# Altium PCB AIRZAI_LED_SENSE_FLEX_REVA.PcbDoc (part 2 of 2)
Units mm, origin at the board's own origin, x right, y up, seen from the top; angles counter-clockwise.
Board outline 70.94 x 92.79 mm, 2 copper layers (Top Layer, Bottom Layer); 62 components, 41 nets, 168 pads, 73 vias.
Unrouted connection lines stored in the file: 86.
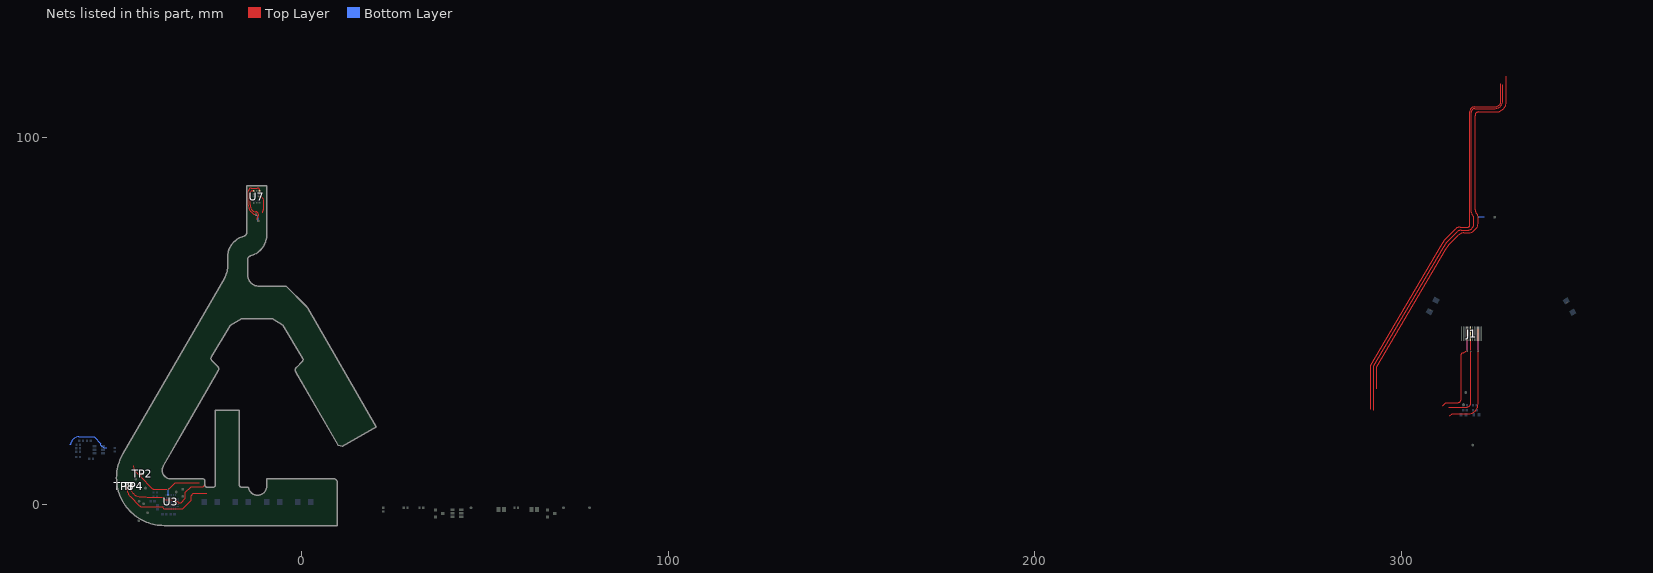
[diagram p2: the nets of this part, all layers, seen from the top]

## Via types
v1: diameter 0.406, hole 0.203, Top Layer to Bottom Layer, tented both sides, 51 vias
v2: diameter 0.508, hole 0.254, Top Layer to Bottom Layer, tented both sides, 17 vias
v3: diameter 0.508, hole 0.203, Top Layer to Bottom Layer, 5 vias

## Nets (pads, with @x,y where several pads share a name; then routed paths per layer and width w, separated by ;. In a path a pad name is that pad's centre, name@x,y a point inside that pad or via, vN(x,y) a via of type N, cw(c..) or ccw(c..) an arc to the next point about the centre after c; other vN are vias at no path point) (continued)
SDA: J1.9 TP2.1 U3.8 U7.9 | length 177.4
  Top Layer w0.152: -40.302,4.089 -36.369,4.089 -34.63,5.828 -27.97,5.828 ; 311.355,26.88 312.193,27.718 315.491,27.718 ccw(c315.491,28.586) 316.104,27.972 ccw(c315.535,28.542) 316.34,28.542 316.34,40.967 316.67,41.297 317.128,41.297 317.576,41.746 v1(317.977,41.746) J1.9@317.977,46.546 J1.9@317.977,47.752
  Top Layer w0.203: -45.978,10.462 ccw(c-43.438,10.462) -45.234,8.666 -44.175,7.607 ; TP2.1@-43.514,8.287 -44.175,7.607 ; -40.302,4.089 cw(c-40.302,4.948) -40.909,4.341 -44.175,7.607 ; U7.9@-11.538,83.895 -11.348,83.895 cw(c-11.348,83.157) -10.826,83.679 cw(c-11.991,82.514) -10.344,82.514 -10.344,80.802 cw(c-11.124,80.802) -10.572,80.25 ccw(c-9.898,79.575) -10.852,79.575 ; 293.345,37.498 312.212,69.537 313.158,70.949 315.646,73.437 cw(c317.12,71.963) 317.12,74.048 318.392,74.048 ccw(c318.392,76.129) 319.864,74.658 320.471,75.265 ccw(c319.238,76.497) 320.981,76.497 320.981,78.456 ccw(c319.867,78.456) 320.655,79.243 cw(c321.83,80.418) 320.168,80.418 320.168,106.068 cw(c321.223,106.068) 320.477,106.814 cw(c321.027,106.265) 321.027,107.042 325.973,107.042 ccw(c325.973,109.582) 327.769,107.786 327.959,107.975 ccw(c326.163,109.771) 328.703,109.771 328.703,116.757 ; 293.346,31.514 293.346,37.497
  Bottom Layer w0.152: -63.396,16.314 ccw(c-63.396,16.803) -63.051,16.457 ccw(c-63.441,16.847) -62.889,16.847 cw(c-61.785,16.847) -62.566,17.628 -62.457,17.736 cw(c-60.912,16.191) -60.912,18.376 -56.684,18.376 -54.841,16.534 -54.841,16.117 -54.117,15.392 -53.222,15.392 ; U3.8@-36.535,2.555 -36.535,3.923 v1@-36.517,3.941 ; v1(320.977,78.493) 322.709,78.493
  Bottom Layer w0.203: v1(317.977,41.746) J1.9@317.977,46.546 J1.9@317.977,46.575
  other v1: -36.517,4.043
TOFINT: J1.7 TP4.1 U7.7 | length 177.6
  Top Layer w0.152: -42.819,2.072 -42.421,2.072 -42.203,1.854 -37.988,1.854 -37.307,1.172 -35.555,1.172 -35.17,0.787 -34.082,0.787 -33.726,0.432 -32.939,0.432 -31.796,1.575 -31.796,3.2 -30.224,4.772 -26.944,4.772 -26.319,5.397 ; 313.006,26.448 317.591,26.448 ccw(c317.591,28.009) 318.695,26.906 ccw(c318.014,27.587) 318.977,27.587 v1(318.977,41.805) J1.7@318.977,46.546 J1.7@318.977,47.723
  Top Layer w0.203: -46.829,4.647 ccw(c-44.292,4.786) -46.088,2.99 -45.915,2.816 ccw(c-44.119,4.612) -44.119,2.072 -42.819,2.072 ; -46.816,4.863 TP4.1@-46.054,4.882 ; -13.58,79.487 -13.867,79.775 cw(c-12.071,81.571) -14.611,81.571 -14.611,85.417 cw(c-13.657,85.417) -14.332,86.092 cw(c-13.841,85.601) -13.841,86.295 -12.173,86.295 cw(c-12.173,85.612) -11.69,86.095 cw(c-12.058,85.727) -11.538,85.727 U7.7@-11.538,85.495 ; -13.579,79.487 ccw(c-12.477,80.589) v2(-12.477,79.031) ; 292.494,37.752 311.469,69.974 312.447,71.508 315.262,74.323 cw(c316.438,73.147) 316.438,74.81 318.273,74.81 ccw(c318.273,76.198) 319.254,75.216 319.425,75.388 ccw(c318.475,76.338) 319.819,76.338 319.819,78.176 ccw(c319.191,78.176) 319.635,78.62 cw(c320.739,79.724) 319.178,79.724 319.178,107.029 cw(c320.132,107.029) 319.457,107.703 cw(c320.07,107.09) 320.07,107.957 325.416,107.957 ccw(c325.416,110.497) 327.212,108.701 ccw(c326.064,109.848) 327.687,109.848 327.687,114.434 ; 292.496,25.699 292.496,37.751
  Bottom Layer w0.203: v2(-12.477,79.031) cw(c-13.949,77.559) -11.868,77.559 v2(-11.868,77.253) ; v1(318.977,41.805) J1.7@318.977,46.546
XSHUNT: J1.3 TP8.1 U7.5 | length 179.2
  Top Layer w0.152: -44.393,-0.357 ccw(c-43.421,0.616) -43.421,-0.759 -38.174,-0.759 -37.718,-1.215 -32.504,-1.215 -30.256,1.033 -30.256,2.366 -29.587,3.034 -26.006,3.034 ; 313.318,24.086 313.898,24.666 318.384,24.666 ccw(c318.384,27.206) 320.18,25.41 320.233,25.464 ccw(c318.437,27.26) 320.977,27.26 v1(320.977,41.805) J1.3@320.977,46.546 J1.3@320.977,47.723
  Top Layer w0.203: TP8.1@-48.442,4.863 -47.645,4.863 -47.645,3.948 ccw(c-45.105,3.948) -46.901,2.151 -44.393,-0.357 ; U7.5@-13.138,85.495 -13.552,85.495 ccw(c-13.552,84.931) -13.951,85.33 ccw(c-13.495,84.875) -14.139,84.875 -14.139,81.732 ccw(c-11.934,81.732) -13.493,80.174 ccw(c-12.574,81.093) -12.574,79.793 cw(c-12.574,79.113) -12.093,79.594 cw(c-12.699,78.988) -11.842,78.988 -11.842,78.879 cw(c-12.598,78.879) -12.064,78.345 -12.094,78.315 ccw(c-11.412,77.634) -12.376,77.634 ; 291.678,37.955 310.774,70.383 311.837,72.118 314.849,75.129 cw(c316.102,73.876) 316.102,75.648 318.298,75.648 ccw(c318.298,75.995) 318.543,75.75 ccw(c318.114,76.179) 318.721,76.179 318.721,107.042 cw(c320.195,107.042) 319.152,108.084 cw(c319.95,107.287) 319.95,108.414 325.341,108.414 ccw(c325.341,110.582) 326.874,109.049 ccw(c326.138,109.785) 327.179,109.785 327.179,114.815 ; 291.679,25.915 291.679,37.955
  Bottom Layer w0.203: v1(320.977,41.805) J1.3@320.977,46.546
pads on no net: U7.8
copper on no net: | length 287.3
  Top Layer w0.152: -42.692,1.503 -38.168,1.503 -37.533,0.868 -36.778,0.868 -35.987,0.076 -35.58,0.076 -35.195,0.461 -34.256,0.461 -33.863,0.068 -32.821,0.068 -31.491,1.398 -31.491,2.946 -30.082,4.355 -26.81,4.355 -26.211,4.954 ; 313.113,26.006 317.913,26.006 ccw(c317.913,27.647) 319.073,26.487 ccw(c318.098,27.462) 319.477,27.462 v1(319.477,42.262) 319.477,46.546 319.477,48.181
  Top Layer w0.203: -47.239,4.329 ccw(c-44.699,4.329) -46.495,2.532 -46.209,2.246 ccw(c-44.413,4.043) -44.413,1.503 ; -44.429,0.787 -44.413,1.503 ; -42.692,1.503 -44.413,1.503 ; -42.466,3.454 -42.345,3.454 cw(c-42.345,2.688) -41.803,3.23 -41.387,2.814 ccw(c-41.165,3.035) -41.165,2.722 -35.86,2.722 -35.464,2.326 -34.452,2.326 -34.056,1.93 -33.878,1.93 -33.353,1.405 v1(-32.987,1.405) ; -42.032,2.616 -41.68,2.265 -36.088,2.265 -35.011,1.187 -33.887,1.187 -33.876,1.198 -33.583,0.905 v1(-33.291,0.905) ; 292.084,37.828 311.132,70.173 312.117,71.799 314.912,74.594 cw(c316.353,73.153) 316.353,75.191 318.239,75.191 ccw(c318.239,76.232) 318.975,75.496 ccw(c318.3,76.17) 319.254,76.17 v1(319.254,78.061) ; 292.085,25.38 292.085,37.828
  Top Layer w0.305: v2(-45.004,5.308) -45.004,5.112 ccw(c-42.464,5.112) -44.26,3.316 -44.119,3.175 ccw(c-43.204,4.09) -43.204,2.796 -42.466,2.796 cw(c-42.466,2.182) -42.032,2.616 ; v2(-43.586,5.139) -43.586,4.006 ccw(c-43.136,4.006) -43.454,3.687 -43.393,3.626 ccw(c-42.979,4.041) -42.979,3.454 -42.466,3.454
  Bottom Layer w0.152: -63.318,17.03 ccw(c-63.617,17.33) -63.194,17.33 cw(c-62.477,17.33) -62.984,17.837 -62.83,17.99 cw(c-61.052,16.212) -61.052,18.727 -56.493,18.727 -54.507,16.741 -54.507,16.314 ccw(c-53.489,17.332) -53.489,15.892 -53.222,15.892 ; v1(319.254,78.061) 319.254,78.307 cw(c319.948,78.307) 319.457,78.798 cw(c319.886,78.369) 319.886,78.976 322.223,78.976 ccw(c322.223,79.774) 322.788,79.21
  Bottom Layer w0.203: -33.885,0.905 v1(-33.291,0.905) ; -33.885,1.405 v1(-32.987,1.405) ; v1(319.477,42.262) 319.477,46.546
  Bottom Layer w0.305: -59.587,17.268 -59.528,17.327 -58.639,17.327 -58.639,16.91 -57.622,15.892 ; v2(-45.004,5.308) -45.004,8.287 ; v2(-43.586,5.139) -41.558,5.139 ; 294.321,29.339 307.723,52.556 ; 297.766,26.191 301.271,32.062 316.079,57.589 315.85,58.884 314.479,60.307 314.326,60.713 314.352,61.17 314.479,61.577 319.787,70.39 323.031,72.322 331.7,72.245 334.799,70.365 343.401,56.408 345.027,55.469

## Polygon pours and split planes (outlines as drawn)
3V3 on Top Layer "3.3V Top 1" (solid, remove dead copper, pour order 16): 316.054,76.087 318.289,76.087 318.289,107.382 cw(c319.676,107.382) 318.695,108.363 cw(c319.799,107.26) 319.799,108.821 325.292,108.821 ccw(c325.292,110.555) 326.518,109.329 ccw(c325.967,109.881) 326.747,109.881 326.747,114.663 324.817,114.663 324.817,112.337 cw(c323.256,112.337) 324.359,111.234 cw(c323.01,112.583) 323.01,110.675 317.293,110.675 ccw(c317.293,109.461) 316.435,110.319 ccw(c317.354,109.399) 316.054,109.399
3V3 on Bottom Layer "3v3 bot 1" (solid, remove dead copper, pour order 14): 290.933,14.612 289.307,14.612 288.037,15.298 287.021,16.161 286.107,17.33 285.624,18.168 285.066,19.769 284.913,21.284 285.091,23.261 285.548,25.37 286.336,28.411 287.529,31.147 290.146,35.618 295.835,45.295 302.998,57.462 309.704,68.739 311.736,72.346 315.012,75.802 315.919,76.709 cw(c317.715,74.913) 317.715,77.453 323.42,77.453 323.42,76.211 318.135,76.211 ccw(c318.176,73.322) 316.104,75.336 313.107,72.339 311.329,69.679 289.028,31.782 287.682,28.993 286.971,26.321 286.285,23.451 286.132,21.8 286.209,20.225 286.717,18.778 287.529,17.609 288.469,16.669 289.511,15.958 290.019,15.73 290.806,15.653 290.933,15.653

## Keep-outs
Keep-Out Layer:
  lines w0.05: 315.952,48.546 cw(c315.977,48.546) 315.977,48.572 322.477,48.572 cw(c322.477,48.546) 322.503,48.546
  lines w0.127: 284.551,21.17 284.564,21.551 284.761,23.426 285.269,25.788 286.005,28.455 287.182,31.264 305.837,63.043 311.444,72.594 314.067,75.416 314.575,75.924 314.716,76.072 314.975,76.388 315.203,76.728 315.395,77.088 315.552,77.466 315.67,77.857 315.75,78.258 315.79,78.664 315.795,78.869 315.795,79.528 315.795,109.729 315.795,109.852 315.843,110.094 315.938,110.323 316.075,110.528 316.162,110.615 316.259,110.712 316.486,110.863 316.738,110.968 317.006,111.021 322.839,111.021 323.026,111.031 323.393,111.104 323.739,111.247 324.05,111.454 324.188,111.58 324.26,111.659 324.379,111.837 324.46,112.034 324.502,112.243 324.507,112.35 324.507,124.204 330.007,124.204 330.007,108.009 330.007,107.902 329.965,107.692 329.883,107.494 329.764,107.316 329.688,107.24 329.555,107.107 329.243,106.898 328.896,106.754 328.527,106.681 322.643,106.681 322.507,106.674 322.24,106.621 321.989,106.517 321.763,106.366 321.662,106.275 321.579,106.183 321.443,105.979 321.349,105.752 321.301,105.511 321.295,105.389 321.295,80.627 321.307,80.542 321.376,80.385 321.495,80.261 321.649,80.187 321.733,80.171 322.156,80.171 322.238,80.185 322.387,80.259 322.496,80.385 322.548,80.543 322.551,80.627 322.551,105.277 332.051,105.277 332.051,86.434 332.058,86.134 332.117,85.535 332.235,84.944 332.409,84.369 332.639,83.813 332.923,83.282 333.257,82.782 333.639,82.316 333.847,82.098 340.644,75.301 343.242,72.457 348.766,62.858 359.97,43.386 359.97,42.297 350.72,36.972 350.675,36.946 349.453,37.275 337.935,57.293 337.885,57.361 337.814,57.516 337.775,57.681 337.768,57.851 337.795,58.019 337.854,58.178 337.943,58.322 338.059,58.447 338.127,58.497 339.66,60.075 339.813,60.304 339.889,60.634 339.813,60.964 334.376,70.034 331.517,71.763 323.517,71.798 323.337,71.799 323.158,71.797 320.031,69.95 314.836,61.28 314.76,60.95 314.836,60.619 314.988,60.391 316.521,58.813 316.59,58.763 316.705,58.638 316.794,58.494 316.854,58.334 316.88,58.167 316.874,57.997 316.835,57.832 316.764,57.677 316.714,57.609 306.949,40.639 301.807,31.703 301.709,31.53 301.558,31.164 301.47,30.778 301.448,30.382 301.493,29.989 301.602,29.608 301.774,29.251 302.003,28.928 302.283,28.648 302.606,28.418 302.963,28.246 303.344,28.136 303.539,28.105 305.119,28.099 315.383,28.099 315.501,28.114 315.718,28.209 315.882,28.379 315.968,28.6 315.977,28.718 315.977,48.546 322.477,48.546 322.477,28.709 322.488,28.591 322.578,28.372 322.744,28.203 322.962,28.112 323.081,28.099 325.291,28.099 325.391,28.1 325.574,28.024 325.715,27.884 325.791,27.7 325.791,27.601 325.791,25.146 325.803,25.037 325.889,24.837 326.045,24.685 326.247,24.604 326.356,24.594 328.06,24.594 328.169,24.604 328.371,24.685 328.527,24.837 328.613,25.037 328.625,25.146 328.625,27.601 328.624,27.701 328.7,27.886 328.841,28.028 329.025,28.105 329.125,28.105 348.185,28.105 348.335,28.105 348.532,28.066 348.717,27.99 348.883,27.879 349.025,27.737 349.136,27.571 349.212,27.386 349.251,27.19 349.251,27.089 349.251,15.382 349.251,15.28 349.211,15.079 349.133,14.889 349.019,14.719 348.874,14.574 348.703,14.46 348.514,14.381 348.313,14.341 342.527,14.341 289.227,14.342 288.874,14.486 288.201,14.845 287.568,15.269 286.981,15.756 286.447,16.299 285.97,16.894 285.556,17.534 285.209,18.213 284.932,18.924 284.729,19.658 284.602,20.41 284.551,21.17 ; 307.092,53.76 309.086,52.613 310.129,54.426 308.136,55.573 307.092,53.76 ; 313.666,20.639 315.766,20.639 315.766,22.939 313.666,22.939 313.666,20.639 ; 322.166,20.639 324.266,20.639 324.266,22.939 322.166,22.939 322.166,20.639 ; 330.666,20.639 332.766,20.639 332.766,22.939 330.666,22.939 330.666,20.639 ; 339.166,20.639 341.266,20.639 341.266,22.939 339.166,22.939 339.166,20.639 ; 344.396,54.265 345.44,52.452 347.433,53.599 346.389,55.412 344.396,54.265

## Other copper
Top Layer:
  pour cut-out: 326.442,96.933 326.442,87.154 326.493,86.773 326.62,86.316 326.823,85.834 326.976,85.58 327.128,85.351 327.491,84.945 333.783,78.62 333.783,77.452 331.395,77.426 331.395,75.67 334.037,75.648 334.037,75.47 336.043,75.47 336.043,78.493 335.942,78.518 335.916,78.569 335.916,78.722 335.866,78.874 335.739,79.128 335.281,79.611 328.576,86.316 328.347,86.646 328.22,87.002 328.169,87.231 328.169,96.933
  pour cut-out: 329.922,73.515 336.501,72.041 336.526,72.016 343.562,60.256 345.111,60.942 344.73,61.678 337.771,73.312 337.669,73.438 337.489,73.565 337.288,73.642 329.922,75.293
  pour cut-out: 323.496,75.597 323.496,77.02 324.969,77.02 324.994,77.045 324.994,77.858 329.964,77.858 329.998,77.824 329.998,75.452 330.176,75.452 330.176,73.464 329.668,73.565 327.001,73.565 327.001,74.073 324.523,74.073 317.781,70.975 311.761,60.332 310.186,61.196 316.435,72.194 316.562,72.346 316.714,72.448
  pour cut-out: 322.551,96.806 332.051,96.806 332.051,105.277 322.551,105.277
  pour cut-out: 315.952,48.546 315.952,44.04 322.503,44.04 322.503,48.546
Bottom Layer:
  rectangle net 3V3: -63.499,14.129 -61.263,14.587
  rectangle net 3V3: -14.198,80.627 -12.833,84.923
  rectangle net 3V3: -14.738,76.128 -12.96,84.923
  rectangle net 3V3: 290.654,14.612 319.965,15.653
  rectangle net +5V: 310.313,16.339 318.619,17.75
  rectangle net 3V3: 319.025,14.993 319.965,27.82
  rectangle net NetJ1_11: 320.245,26.525 321.057,29.242
  rectangle net NetJ1_11: 317.171,28.286 321.057,29.242
  rectangle net NetJ1_11: 317.171,28.286 317.96,40.088
  rectangle net NetJ1_12: 316.344,26.55 317.273,27.82
  rectangle net NetJ1_12: 316.231,26.55 316.981,40.088
  rectangle net +5V: 317.606,16.441 318.619,27.82
  pour cut-out: -37.985,2.845 cw(c-38.017,2.813) -37.972,2.813 -37.972,-1.561 -33.636,-1.561 -33.636,2.855 -37.968,2.855
  pour cut-out: 343.308,60.942 344.603,61.653 344.883,61.5 345.06,61.323 345.187,61.069 345.213,60.84 345.518,60.281 345.899,60.484 351.639,50.578 345.949,47.302 340.133,57.386 343.968,59.468 343.765,59.951 343.511,60.154 343.384,60.307 343.308,60.561
  pour cut-out: 310.669,61.754 312.015,61.043 311.99,60.688 311.913,60.484 311.812,60.307 311.659,60.154 311.228,59.291 311.278,59.214 314.25,57.487 308.637,47.581 308.611,47.53 307.672,47.962 302.973,50.705 303.379,51.639 308.586,60.561 308.611,60.637 309.678,60.18 310.059,60.916 310.129,61.246 310.288,61.475 310.44,61.653
  pour cut-out: 315.952,48.546 315.952,44.04 322.477,44.04 322.477,48.546

## Silkscreen, mask and mechanical layers (free items; w line width, h text height)
Mechanical 1:
  drawing of 2006 lines, arcs and shapes, not listed
  text "5,5" at -3.382,75.784 h3.5
  text "12,16" at 166.946,72.688 h3.5 r330.09
  text "87,58" at 80.194,54.952 h3.5 r90
  text "93,13" at 71.168,52.177 h3.5 r90
  text "103,45" at 106.895,48.119 h3.5 r90
  text "102,35" at 99.098,47.569 h3.5 r90
  text "~}" at -12.117,37.361 h3.5
  text "R13" at -59.401,3.253 h3.5 r21.62
  text "60,27" at 192.201,-0.86 h3.5
  text "15,03" at 74.901,-3.766 h3.5
  text "0,4" at -96.746,-4.771 h3.5
  text "70,94" at 186.866,-9.87 h3.5
Mechanical 2:
  lines w0.013: -7.135,59.515 -7.135,76.715
Mechanical 3:
  lines w0.152: -10.425,80.079 -10.425,80.562 ; 321.591,29.192 321.591,28.709 ; 321.7,43.964 321.7,43.482 ; 322.071,28.709 321.591,28.709 ; 322.179,43.482 321.7,43.482 ; 328.05,46.428 324.646,46.428 321.7,43.482 ; 328.169,33.789 326.671,33.789 321.591,28.709 ; 329.609,117.261 329.13,117.261 332.889,121.02 334.794,121.02 ; 329.688,96.458 329.688,95.975 ; 329.917,81.675 329.917,81.193 ; 330.168,95.975 329.688,95.975 ; 330.397,81.193 329.917,81.193 ; 335.353,99.735 333.448,99.735 329.688,95.975 ; 335.581,84.952 333.676,84.952 329.917,81.193
  text "BEND DOWN" at 335.454,120.461 h1.02
  text "BEND UP" at 335.962,99.252 h1.02
  text "BEND DOWN" at 336.191,84.469 h1.02
  text "BEND DOWN" at 328.786,45.996 h1.02
  text "BEND DOWN" at 328.804,33.454 h1.02
Mechanical 4:
  drawing of 239 lines, arcs and shapes, not listed
  text "Flex PCB Outline" at 319.66,11.132 h1.52
Mechanical 5:
  circle w0.05: c313.407,31.786 r11.375
  circle w0.05: c327.257,80.717 r2.125
  circle w0.05: c341.107,31.786 r11.375
  lines w0.05: 284.57,18.14 ccw(c287.168,16.64) 287.168,13.64 291.368,13.64 291.368,15.04 cw(c292.368,15.04) 292.368,16.04 296.74,16.04 ccw(c296.74,17.04) 297.639,16.602 cw(c299.618,15.64) 301.818,15.64 301.818,14.14 326.457,14.14 326.457,16.84 cw(c327.257,16.84) 328.057,16.84 328.057,14.14 352.697,14.14 352.697,15.64 cw(c354.897,15.64) 356.875,16.602 ccw(c357.775,17.04) 357.775,16.04 362.147,16.04 cw(c362.147,15.04) 363.147,15.04 363.147,13.64 367.347,13.64 ccw(c367.347,16.64) 369.945,18.14 329.855,87.577 ccw(c327.257,86.077) 324.659,87.577 284.57,18.14
  lines w0.2: 316.094,15.222 316.094,36.761 ; 322.394,15.222 322.394,36.761
Mechanical 12:
  circle w0.013: c-30.366,32.633 r2.5
  circle w0.013: c6.634,32.632 r2.5
  circle w0.013: c0.633,0.632 r2.5
  circle w0.013: c-7.867,0.633 r2.5
  circle w0.013: c-16.367,0.633 r2.5
  circle w0.013: c-24.867,0.633 r2.5
  circle w0.013: c-30.366,32.633 r1.5
  circle w0.013: c6.634,32.632 r1.5
  circle w0.013: c0.633,0.632 r1.5
  circle w0.013: c-7.867,0.633 r1.5
  circle w0.013: c-16.367,0.633 r1.5
  circle w0.013: c-24.867,0.633 r1.5
  lines w0.013: -104.94,0.342 -103.94,0.342 ; -104.94,0.343 -104.94,5.341 -103.94,5.342 ; -104.94,32.342 -103.94,32.342 ; -104.94,32.343 -104.94,37.341 ; -104.94,37.342 -103.94,37.342 ; -28.128,137.488 -28.128,138.488 -23.128,138.488 -23.128,137.488 ; -22.127,137.488 -22.127,138.488 -17.127,138.488 -17.127,137.488 ; -13.627,137.488 -13.627,138.488 -8.627,138.488 -8.627,137.488 ; -5.127,137.488 -5.127,138.488 -0.127,138.488 -0.127,137.488 ; 3.373,137.488 3.373,138.488 8.373,138.488 8.373,137.488 ; 8.872,137.488 8.872,138.488 13.872,138.488 13.872,137.488 ; 94.127,0.343 95.127,0.343 ; 94.127,5.343 95.127,5.343 ; 94.127,32.343 95.127,32.343 ; 94.127,37.343 95.127,37.343 ; 95.127,0.344 95.127,5.342 ; 95.127,32.344 95.127,37.342 ; 164.821,45.333 cw(c165.101,43.859) 165.101,45.359 ; 165.819,42.542 ccw(c165.101,43.859) 165.976,42.64 ; 166.527,44.325 cw(c165.101,43.859) 166.595,43.727 ; 170.041,12.92 cw(c171.102,11.859) 170.16,13.027 ; 170.041,10.799 ccw(c171.102,11.859) 170.16,10.691 ; 172.043,10.691 ccw(c171.102,11.859) 172.162,10.799 ; 172.043,13.027 cw(c171.102,11.859) 172.162,12.92 ; 178.541,10.799 ccw(c179.602,11.859) 178.66,10.692 ; 178.541,12.92 cw(c179.602,11.859) 178.66,13.027 ; 180.543,10.692 ccw(c179.602,11.859) 180.662,10.799 ; 180.543,13.027 cw(c179.602,11.859) 180.662,12.92 ; 187.041,10.799 ccw(c188.102,11.86) 187.16,10.692 ; 187.041,12.92 cw(c188.102,11.86) 187.16,13.028 ; 189.043,10.692 ccw(c188.102,11.86) 189.162,10.799 ; 189.043,13.028 cw(c188.102,11.86) 189.162,12.92 ; 195.541,10.799 ccw(c196.602,11.86) 195.66,10.692 ; 195.541,12.921 cw(c196.602,11.86) 195.66,13.028 ; 197.543,10.692 ccw(c196.602,11.86) 197.662,10.799 ; 197.543,13.028 cw(c196.602,11.86) 197.662,12.921 ; 203.416,44.581 cw(c202.101,43.86) 203.499,44.404
Mechanical 15:
  pour cut-out: 308.136,55.573
  pour cut-out: 346.389,55.412
  lines w0.05: 313.666,20.639 315.766,20.639 ; 313.666,20.639 313.666,22.939 ; 313.666,20.639 315.766,22.939 ; 313.666,22.939 315.766,22.939 ; 313.666,22.939 315.766,20.639 ; 315.766,20.639 315.766,22.939 ; 322.166,20.639 324.266,20.639 ; 322.166,20.639 322.166,22.939 ; 322.166,20.639 324.266,22.939 ; 322.166,22.939 324.266,22.939 ; 322.166,22.939 324.266,20.639 ; 324.266,20.639 324.266,22.939 ; 330.666,20.639 332.766,20.639 ; 330.666,20.639 330.666,22.939 ; 330.666,20.639 332.766,22.939 ; 330.666,22.939 332.766,22.939 ; 330.666,22.939 332.766,20.639 ; 332.766,20.639 332.766,22.939 ; 339.166,20.639 341.266,20.639 ; 339.166,20.639 339.166,22.939 ; 339.166,20.639 341.266,22.939 ; 339.166,22.939 341.266,22.939 ; 339.166,22.939 341.266,20.639 ; 341.266,20.639 341.266,22.939 ; 307.092,53.76 309.086,52.613 310.129,54.426 308.136,55.573 307.092,53.76 ; 344.396,54.265 346.389,55.412 347.433,53.599 345.44,52.452 344.396,54.265
Drill Drawing:
  text "PWB, LED SENSE FLEX" at 168.668,-77.148 h4
  text "PWB-020218-001" at 173.418,-85.423 h3.25
  text "1" at 235.018,-86.923 h2
  text "1" at 230.218,-87.023 h2
Mechanical 17:
  text "PWA, LED SENSE FLEX" at 169.751,-79.042 h4
  text "PWA-020218-001" at 174.678,-86.434 h3.25
  text "1" at 230.018,-86.723 h1.5
  text "1" at 234.818,-86.723 h1.5
  text "NOTES: /  / 1. ALL ASSEMBLY MATERIALS TO BE RoHS COMPLIANT. /  / 2. MATERIAL: /           • FLEXIBLE METAL CLAD DIELECTRIC IAW                 /             IPC-4204/11 E1E2 O0/0 CU W7 T/T /           • STIFFENER IAW IPC-4203/1-E1E8M1 /  / 3. FINISH:  IMMERSION GOLD /  / ALL EXPOSED CONDUCTIVE PATTERN AREAS NOT COVERED WITH COVERLAY MATERIAL OR OTHER PLATING  / SHALL BE IMMERSION GOLD (0.000030-0.000090 mm) OVER ELECTROLESS NICKEL (0.001-0.006 mm). /  / 4. LEGEND SHALL BE WHITE, PERMANENT, ORGANIC, NON-CONDUCTIVE UV OR EPOXY TYPE INK APPLIED  / TO THE TOP SIDE OF THE BOARD. THERE SHALL BE NO LEGEND ON ANY SOLDERABLE COMPONENT LAND. /  / 5. ALL ASSEMBLY MATERIALS TO BE RoHS COMPLIANT. /  / 6. ANY LABELS OR COMPOSITION OF, APPLIED TO THE BOARD NEED TO BE APPROVIED BY AIRZAI /  / 7. MINIMUM TRACE WIDTHS: /           EXTERNAL: 0.203 mm  INTERNAL: N/A /  / 8. MINIMUM SPACE BETWEEN FEATURES: /          EXTERNAL: 0.15 mm  INTERNAL: N/A /  / 9. Overall Board Thickness: 0.3mm" at -127.099,-163.726 h2
Mechanical 18:
  lines w0.127: -128.317,-32.518 -123.237,-32.518 ; -128.317,27.807 -123.237,27.807 ; -128.317,88.132 -123.237,88.132 ; -64.817,-92.843 -64.817,-87.763 ; -64.817,143.377 -64.817,148.457 ; -1.317,-92.843 -1.317,-87.763 ; -1.317,143.377 -1.317,148.457 ; 62.183,-92.843 62.183,-87.763 ; 62.183,143.377 62.183,148.457 ; 125.683,-92.843 125.683,-87.763 ; 125.683,143.377 125.683,148.457 ; 133.283,-80.199 247.583,-80.199 ; 133.283,-74.059 160.478,-74.059 ; 133.283,-68.114 160.478,-68.114 ; 133.283,-62.759 160.478,-62.759 ; 133.303,-87.763 247.603,-87.763 ; 149.178,-87.844 149.178,-57.364 ; 160.478,-87.819 160.478,-57.339 ; 160.478,-70.879 247.579,-70.879 ; 169.113,-57.339 247.583,-57.339 ; 171.383,-57.339 133.283,-57.339 ; 189.183,-92.843 189.183,-87.763 ; 189.183,143.377 189.183,148.457 ; 238.023,-87.819 238.023,-80.199 ; 247.603,-57.283 247.603,-87.763 ; 247.603,-32.518 252.683,-32.518 ; 247.603,27.807 252.683,27.807 ; 247.603,88.132 252.683,88.132 ; 97.723,-87.819 133.283,-87.819 ; 97.723,-87.819 133.283,-87.819 ; 97.723,-87.819 97.723,-57.339 133.283,-57.339 ; 133.283,-87.819 247.583,-87.819 ; 133.283,-87.819 247.583,-87.819 ; 133.283,-87.819 133.283,-57.339 ; 247.583,-87.819 247.583,-57.339 ; 247.583,-87.819 247.583,-57.339 ; 247.603,-87.763 247.603,143.377 -123.237,143.377 -123.237,-87.763 247.603,-87.763 ; -128.317,-92.843 -128.317,148.457 252.683,148.457 252.683,-92.843 -128.317,-92.843
  text "1" at -97.041,145.155 h1.78
  text "2" at -33.651,145.155 h1.78
  text "3" at 29.578,145.155 h1.78
  text "4" at 93.247,145.155 h1.78
  text "5" at 156.722,145.155 h1.78
  text "6" at 220.349,145.155 h1.78
  text "A" at -126.412,116.123 h1.78
  text "A" at 249.508,116.123 h1.78
  text "B" at -126.412,55.671 h1.78
  text "B" at 249.508,55.671 h1.78
  text "C" at -126.412,-4.654 h1.78
  text "C" at 249.508,-4.654 h1.78
  text "AIRZAI PROPRIETARY & CONFIDENTIAL" at 137.243,-54.523 h3.25
  text "DATE:" at 149.953,-58.919 h1.14
  text "ENGINEER:" at 133.853,-59.079 h1.14
  text "UNLESS OTHERWISE SPECIFIED" at 100.253,-60.619 h1.5
  text "21/01/19" at 150.139,-61.678 h1.5
  text "FD" at 138.752,-61.837 h2
  text "DIMENSIONS ARE IN MM" at 103.353,-63.819 h1.5
  text "PCB DESIGNER:" at 133.753,-64.372 h1.14
  text "DATE:" at 149.653,-64.419 h1.14
  text "D" at -126.412,-64.852 h1.78
  text "D" at 249.508,-64.852 h1.78
  text "AIRZAI" at 167.868,-65.823 h3.25
  text "TOLERANCES" at 108.453,-67.019 h1.5
  text "21/01/19" at 150.139,-67.128 h1.5
  text "DFM" at 138.082,-67.168 h2
  text "DATE:" at 149.653,-69.819 h1.14
  text "CHECK" at 133.753,-69.872 h1.14
  text "ANGULAR" at 120.753,-71.019 h1.5
  text "DECIMALS" at 100.353,-71.319 h1.5
  text "TITLE:" at 161.793,-72.498 h1.14
  text "FD" at 139.752,-72.837 h2
  text ".XX +/- .127MM" at 99.153,-75.319 h1.5
  text "+/-" at 120.453,-75.419 h1.5
  text "REL" at 134.053,-75.739 h1.14
  text "DATE:" at 150.053,-75.919 h1.14
  text "FD" at 139.502,-78.337 h2
  text ".XXX +/- .080MM" at 98.853,-79.419 h1.5
  text "REV:" at 238.593,-81.819 h1.14
  text "SCALE:" at 150.193,-81.839 h1.14
  text "DWG NO:" at 161.653,-82.039 h1.14
  text "SIZE" at 134.053,-82.119 h1.14
  text "B" at 139.228,-85.436 h3.05
  text "DO NOT SCALE DRAWING" at 100.253,-85.519 h1.8
  text "A" at 240.718,-85.923 h3.05
  text "1:1" at 151.428,-86.036 h3.05
  text "SHEET" at 224.253,-86.839 h1.14
  text "OF" at 230.953,-86.839 h1.14
  text "1" at -97.041,-91.065 h1.78
  text "2" at -33.651,-91.065 h1.78
  text "3" at 29.578,-91.065 h1.78
  text "4" at 93.247,-91.065 h1.78
  text "5" at 156.722,-91.065 h1.78
  text "6" at 220.349,-91.065 h1.78